# Allegro board prototype_rev4.brd
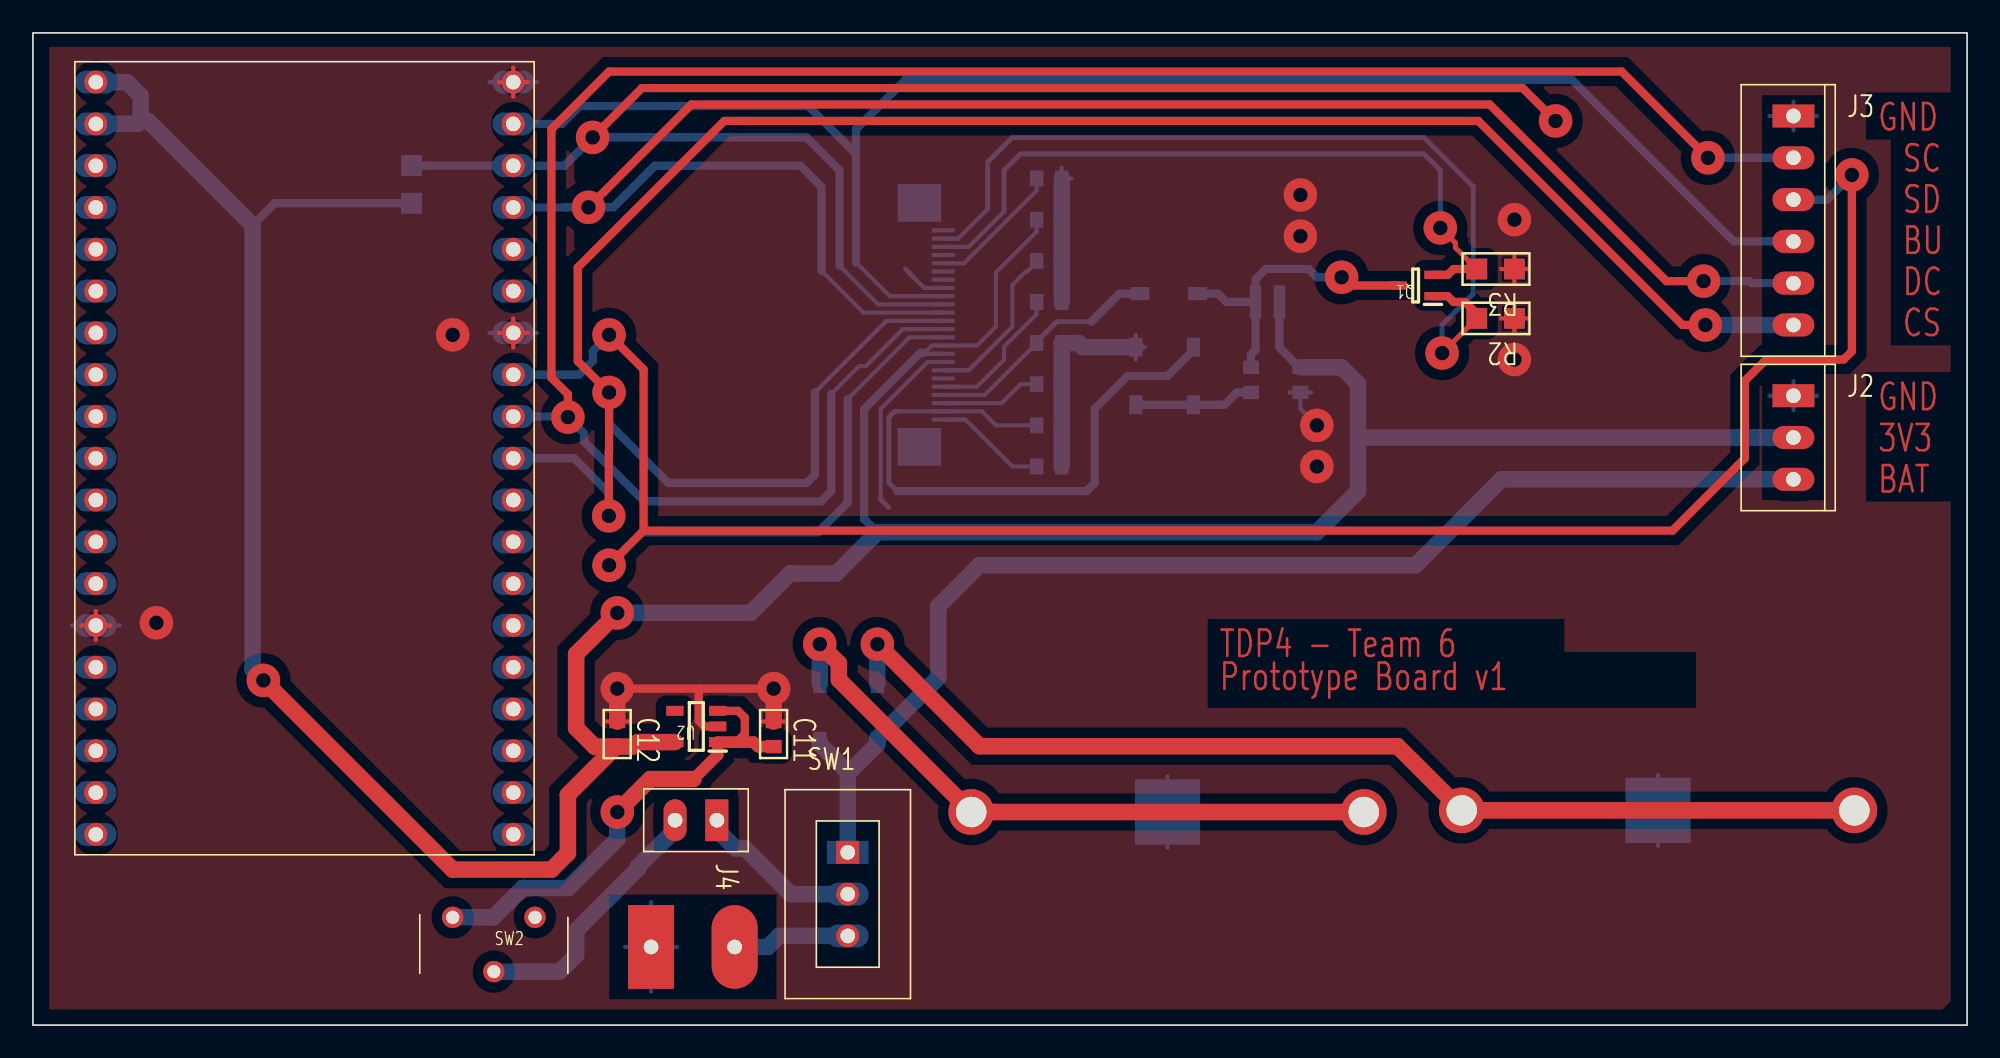
[diagram p0: board, top side]
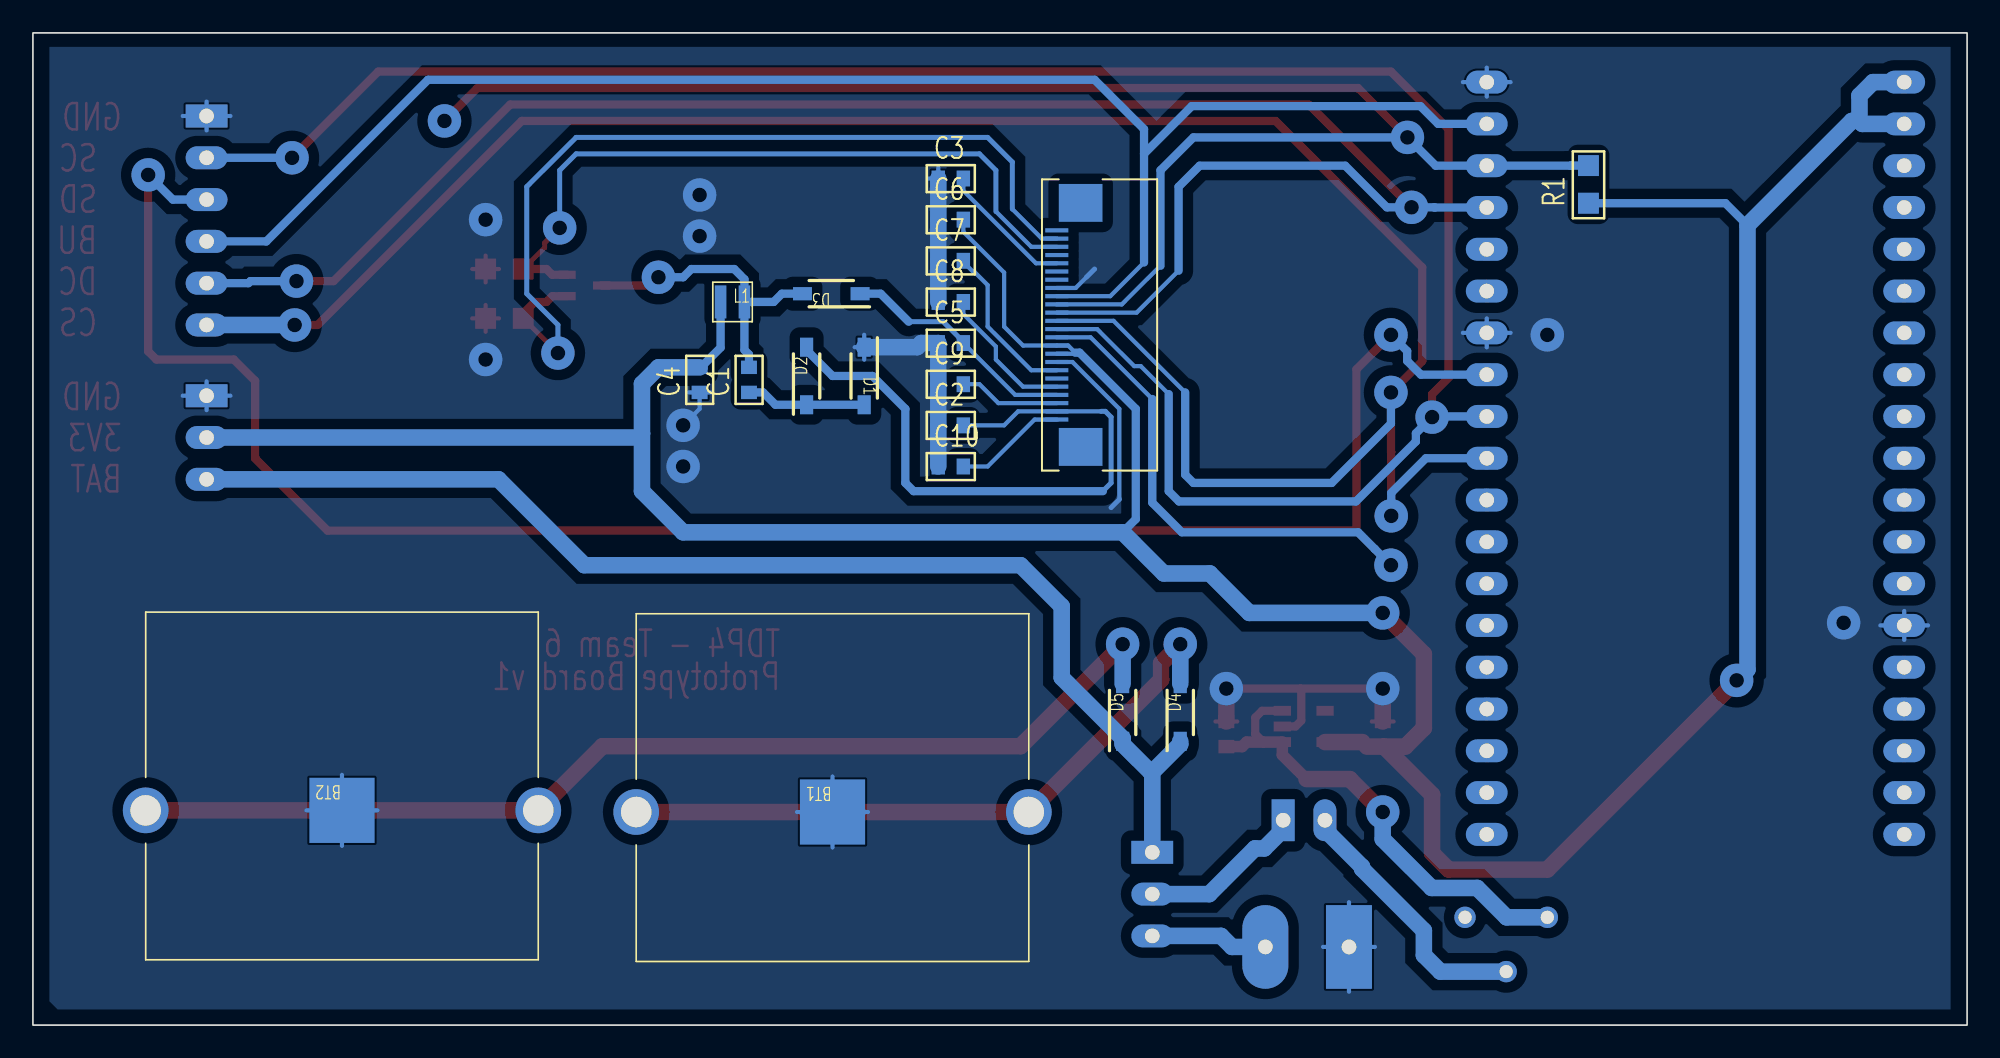
[diagram p1: board, bottom side, seen from below]

Outline 117.5 x 60.3 mm; copper layers: TOP, BOTTOM. Coordinates in mm from the lower left corner of the outline.
Outline path: rectangle 0,0 117.5,60.3

## Design rules (mm)
constraint set DEFAULT: min track width 0.254

## Placement (name value [footprint] x y rotation side)
BT1  Battery_Holder  [30212]  57 12.95 0 bottom
BT2  Battery_Holder  [30212]  86.8 13.05 0 bottom
C1  1u  [GU-C0603]  74 38.45 90 bottom
C2  1u / 50V  [GU-C0603]  62.5 36.45 180 bottom
C3  1u / 25V  [GU-C0603]  62.5 51.45 180 bottom
C4  4.7u  [GU-C0603]  77 38.45 90 bottom
C5  1u / 50V  [GU-C0603]  62.5 41.45 180 bottom
C6  1u / 25V  [GU-C0603]  62.5 48.95 180 bottom
C7  1u / 25V  [GU-C0603]  62.5 46.45 180 bottom
C8  1u / 25V  [GU-C0603]  62.5 43.95 180 bottom
C9  1u / 25V  [GU-C0603]  62.5 38.95 180 bottom
C10  1u / 25V  [GU-C0603]  62.5 33.95 180 bottom
C11  1u  [GU-C0603]  45 18.45 270 top
C12  1u  [GU-C0603]  35.5 18.45 270 top
D1  MBR0530T1  [SOD3716X135N]  67 39.45 270 bottom
D2  MBR0530T1  [SOD3716X135N]  70.5 39.45 90 bottom
D3  MBR0530T1  [SOD3716X135N]  69 44.45 0 bottom
D4  MBR0530T1  [SOD3716X135N]  47.8 19 90 bottom
D5  MBR0530T1  [SOD3716X135N]  51.3 19 90 bottom
J1  SFV24R-4STE1HLF  [AMPHENOL_SFV24R-4STE1HLF]  49.2 33.7 90 bottom
J2  VOLT TP  [GU-MOLEX3]  106.95 38.25 0 top
J3  SPI TP  [GU-MOLEX6]  106.95 55.25 0 top
J4  AMMETER TP  [GU-JUMPER2]  41.55 12.45 270 top
J5  EXT POWER  [GU-TERMINAL2-200]  37.55 4.75 90 top
L1  10uH  [NRH2412T2R2MNGH]  75 43.95 180 bottom
Q1  SI1308EDL-T1-BE3  [SOT65P210X110-3N]  84 44.95 180 top
R1  100k  [GU-R0805]  23 49.95 90 bottom
R2  10k  [GU-R0805]  90 42.95 180 top
R3  3R  [GU-R0805]  90 45.95 180 top
SW1  POWER SELECTOR  [GU-SW-SLIDE-SPDT]  49.5 10.5 0 top
SW2  -  [SSSS213100]  30.5 6.55 0 top
U1  ESP32-DevKitC  [ESP32-DEVKITC]  16.5 34.45 0 top
U2  MIC5317-3.3YM5-TR  [SOT95P280X100-5N]  40.3 18.15 180 top

## Library data of the parts
BT1 BT2 = Battery_Holder_9
C1-C12 = C
D1-D5 = MBR0530T1
J1 = SFV24R-4STE1HLF_0
J2 = CON3
J3 = CON6
J4 = JUMPER
J5 = CON2: User Part Number: TERMINAL2-200
L1 = L
Q1 = SI1308EDL-T1-BE3
R1-R3 = R
SW1 = SW SPDT
SW2 = SSSS213100
U1 = ESP32-DevKitC
U2 = MIC5317-3.3YM5-TR

## Footprints (pads in the part's own frame, mm; a bottom-side part is the same pattern mirrored in y, then rotated)
30212
  round 2.775 hole 1.85: 1(0,0) 2(23.85,0)
  rect 3.96x3.96 smd: NP1(11.925,0)
AMPHENOL_SFV24R-4STE1HLF
  rect 2.3x2.65 smd: (1.44,4.65) (16.27,4.65)
  rect 0.25x1.4 smd: 1(3.1,6.1) 2(3.6,6.1) 3(4.1,6.1) 4(4.6,6.1) 5(5.1,6.1) 6(5.6,6.1) 7(6.1,6.1) 8(6.6,6.1) 9(7.1,6.1) 10(7.6,6.1) 11(8.1,6.1) 12(8.6,6.1) 13(9.1,6.1) 14(9.6,6.1) 15(10.1,6.1) 16(10.6,6.1) 17(11.1,6.1) 18(11.6,6.1) 19(12.1,6.1) 20(12.6,6.1) 21(13.1,6.1) 22(13.6,6.1) 23(14.1,6.1) 24(14.6,6.1)
ESP32-DEVKITC
  round 1.397 hole 0.889: 1(-12.68,22.86) 2(-12.68,20.32) 3(-12.68,17.78) 4(-12.68,15.24) 5(-12.68,12.7) 6(-12.68,10.16) 7(-12.68,7.62) 8(-12.68,5.08) 9(-12.68,2.54) 10(-12.68,0) 11(-12.68,-2.54) 12(-12.68,-5.08) 13(-12.68,-7.62) 14(-12.68,-10.16) 15(-12.68,-12.7) 16(-12.68,-15.24) 17(-12.68,-17.78) 18(-12.68,-20.32) 19(-12.68,-22.86) 20(12.68,-22.86) 21(12.68,-20.32) 22(12.68,-17.78) 23(12.68,-15.24) 24(12.68,-12.7) 25(12.68,-10.16) 26(12.68,-7.62) 27(12.68,-5.08) 28(12.68,-2.54) 29(12.68,0) 30(12.68,2.54) 31(12.68,5.08) 32(12.68,7.62) 33(12.68,10.16) 34(12.68,12.7) 35(12.68,15.24) 36(12.68,17.78) 37(12.68,20.32) 38(12.68,22.86)
GU-C0603
  rect 0.813x0.965 smd: 1(0,0) 2(1.524,0)
GU-JUMPER2
  rect 2.54x1.397 hole 0.889: 1(0,0)
  oval 2.54x1.397 hole 0.889: 2(0,-2.54)
GU-MOLEX3
  rect 2.54x1.397 hole 0.889: 1(0,0)
  oval 2.54x1.397 hole 0.889: 2(0,-2.54) 3(0,-5.08)
GU-MOLEX6
  rect 2.54x1.397 hole 0.889: 1(0,0)
  oval 2.54x1.397 hole 0.889: 2(0,-2.54) 3(0,-5.08) 4(0,-7.62) 5(0,-10.16) 6(0,-12.7)
GU-R0805
  rect 1.27x1.27 smd: 1(0,0) 2(2.286,0)
GU-SW-SLIDE-SPDT
  rect 1.397x1.397 hole 0.889: 1(0,0)
  round 1.397 hole 0.889: 2(0,-2.54) 3(0,-5.08)
GU-TERMINAL2-200
  rect 5.08x2.794 hole 0.889: 1(0,0)
  oval 5.08x2.794 hole 0.889: 2(0,-5.08)
NRH2412T2R2MNGH
  rect 0.7x2 smd: 1(-0.725,0) 2(0.725,0)
SOD3716X135N
  rect 1.15x0.8 smd: 1(-1.75,0) 2(1.75,0)
SOT65P210X110-3N
  rect 1.05x0.5 smd: 1(-1.05,0.65) 2(-1.05,-0.65) 3(1.05,0)
SOT95P280X100-5N
  rect 1.05x0.6 smd: 1(-1.3,0.95) 2(-1.3,0) 3(-1.3,-0.95) 4(1.3,-0.95) 5(1.3,0.95)
SSSS213100
  round 1.3 hole 0.8: 1(0,0) 2(-2.5,-3.3) 3(-5,0)

## Nets
3V3: C4.2 C6.2 C12.2 J1.9 J1.10 J2.2 L1.1 R1.1 U1.1 U1.2 U2.5(VOUT)
GND: BT1.NP1 BT2.NP1 C2.1 C3.1 C4.1 C5.1 C6.1 C7.1 C8.1 C9.1 C10.1 C11.1 C12.1 D1.1(C) J1.8 J1.17 J2.1 J3.1 J5.1 R2.1 R3.1 U1.14 U1.32 U1.38 U2.2
VCC: C11.2 SW2.3(NO) U2.1 U2.3
BATT: D4.1(C) D5.1(C) J2.3 SW1.1
BUSY: J1.16 J3.4 U1.37
DC: J1.14 J3.5 U1.35
E-INK_CS: J1.13 J3.6 U1.29
EXT: J5.2 SW1.3(NO)
GDR: J1.23 Q1.1 R2.2
RESE: J1.22 Q1.2(S) R3.2
RESET: J1.15 R1.2 U1.36
SCL: J1.12 J3.2 U1.30
SDA: J1.11 J3.3 U1.31
VGH: C5.2 D3.1(C) J1.4
VGL: C2.2 D2.2 J1.2
N09940: C1.2 D3.2 L1.2 Q1.3
N26254: C1.1 D1.2 D2.1(C)
N26834: C10.2 J1.1
N27155: C9.2 J1.3
N27189: C8.2 J1.5
N27231: C7.2 J1.7
N27307: C3.2 J1.20
N33521: J4.1 SW1.2
N36276: J4.2 SW2.2
N72588: BT2.1 BT2.2 D5.2
N72605: BT1.1 BT1.2 D4.2

Pads without a net: J1 6 18 19 21 24; SW2 1; U1 3 4 5 6 7 8 9 10 11 12 13 15 16 17 18 19 20 21 22 23 24 25 26 27 28 33 34; U2 4

## Via types
v1: diameter 2.032, hole 0.889, TOP to BOTTOM, 30 vias

## Routing (per net, layer and track width the routed paths; a pad name or vN(x,y) marks a point on that pad's centre or on a via; arc(x,y) is an arc through that point)
3V3: length 217.1
  TOP w0.7: 36.46,16.93 36.73,17.2
  TOP w1: v1(35.5,25.05) 33,22.55 33,18.05 34.12,16.93 35.42,16.93 ; v1(14,20.95) 25.5,9.45 31.5,9.45 32.5,10.45 32.5,14 35.42,16.93 ; 35.42,16.93 C12.2 36.46,16.93 ; 36.73,17.2 U2.5
  BOTTOM w0.254: C6.2 60.98,48.21 58.5,45.74 58.5,42.45 57.35,41.3 J1.10 54.61,41.3 54.18,40.87 54.24,40.8 J1.9
  BOTTOM w0.5: C4.2 76.92,39.97 75.72,41.17 L1.1 ; 13.34,48.61 14.68,49.95 R1.1 ; 54.18,40.87 53.92,40.87 50.5,37.45 50.5,30.75 51.3,29.95
  BOTTOM w1: J2.2 80.74,35.71 80.5,35.95 ; v1(35.5,25.05) 43.6,25.05 46,27.45 48.8,27.45 51.3,29.95 78,29.95 80.5,32.45 80.5,35.95 ; U1.1 5.72,57.31 6.54,56.49 6.54,54.95 ; U1.2 6.36,54.77 6.54,54.95 ; 80.5,35.95 80.5,38.97 79.5,39.97 C4.2 ; 6.54,54.95 7,54.95 13.34,48.61 13.34,21.61 v1(14,20.95)
GND: length 126.2
  TOP w0.254: 29.18,56.43 U1.38 ; U1.38 28.3,57.31 ; U1.38 30.06,57.31 ; U1.38 29.18,58.19 ; 29.18,41.19 U1.32 ; U1.32 30.06,42.07 ; U1.32 29.18,42.95 ; U1.32 28.3,42.07 ; U1.14 4.7,24.29 ; U1.14 3.82,23.41 ; U1.14 3.82,25.17 ; U1.14 2.94,24.29 ; R3.1 90,46.76 ; R3.1 90.81,45.95 ; R3.1 90,45.14 ; R3.1 89.19,45.95 ; 34.84,18.45 C12.1 36.16,18.45 ; R2.1 90.81,42.95 ; R2.1 90,42.14 ; R2.1 89.19,42.95 ; R2.1 90,43.76 ; 45.66,18.45 C11.1 44.34,18.45
  TOP w0.5: v1(45,20.45) 40.5,20.45 ; 40.5,20.45 40.45,20.4 40.45,18.5 40.8,18.15 U2.2 ; 40.5,20.45 v1(35.5,20.45)
  TOP w1: C12.1 v1(35.5,20.45) ; C11.1 v1(45,20.45)
  BOTTOM w0.254: 62.5,52.11 C3.1 63.08,51.45 ; U1.32 30.63,42.07 ; U1.32 27.73,42.07 ; U1.32 29.18,42.95 ; U1.32 29.18,41.19 ; 53.5,45.45 54.15,44.8 J1.17 ; 76.34,38.45 C4.1 ; C4.1 77,37.45 v1(78,36.45) ; C4.1 77.66,38.45 ; 67,40.45 D1.1 ; D1.1 67.58,41.2 ; D1.1 67,41.95 ; J1.8 54.35,40.3 51.5,37.45 51.5,31.95 ; J3.1 106.95,56.13 ; J3.1 106.95,54.37 ; J3.1 108.4,55.25 ; J3.1 105.5,55.25 ; J2.1 106.95,39.13 ; J2.1 108.4,38.25 ; J2.1 105.5,38.25 ; J2.1 106.95,37.37 ; 35.98,4.75 J5.1 ; J5.1 39.12,4.75 ; J5.1 37.55,2.03 ; J5.1 37.55,7.47 ; BT2.NP1 100.88,13.05 ; BT2.NP1 96.57,13.05 ; BT2.NP1 98.72,10.89 ; BT2.NP1 98.72,15.21 ; BT1.NP1 71.08,12.95 ; BT1.NP1 66.77,12.95 ; BT1.NP1 68.92,10.79 ; BT1.NP1 68.92,15.11 ; 29.18,56.43 U1.38 ; U1.38 30.63,57.31 ; U1.38 29.18,58.19 ; U1.38 27.73,57.31 ; 2.37,24.29 U1.14 ; U1.14 3.82,25.17 ; U1.14 3.82,23.41 ; U1.14 5.27,24.29
  BOTTOM w0.3: 52,31.45 51.5,31.95 ; 53,45.95 53.5,45.45
  BOTTOM w1: C10.1 C2.1 C9.1 C5.1 63.53,41.45 63.78,41.2 D1.1 ; C8.1 C7.1 C6.1 C3.1
  vias: v1(7.5,24.45) v1(25.5,41.95) v1(77,50.45) v1(77,47.95) v1(78,33.95) v1(90,48.95) v1(90,40.45)
VCC: length 28.9
  TOP w0.5: 42.75,17.2 43.24,17.7 43.24,18.69 42.83,19.1 U2.3
  TOP w0.7: C11.2 44.04,16.93 43.77,17.2 U2.1 41.6,16.42 40.13,14.95
  TOP w1: 40.13,14.95 37.5,14.95 v1(35.5,12.95)
  BOTTOM w1: SW2.3 27.98,6.55 29.76,8.34 32.53,8.34 35.5,11.31 v1(35.5,12.95)
BATT: length 75
  BOTTOM w1: J2.3 89.22,33.17 84,27.95 57.5,27.95 55,25.45 55,21.12 51.3,17.42 D5.1 51.3,17.07 49.6,15.37 49.5,15.37 ; D4.1 47.8,17.07 49.5,15.37 ; SW1.1 49.5,15.37
BUSY: length 99
  BOTTOM w0.254: 50,46.35 52.05,44.3 J1.16
  BOTTOM w0.5: U1.37 32.13,54.77 33.21,55.85 47.1,55.85 50,52.95 ; 50,52.95 50,54.45 53,57.45 93.5,57.45 103.32,47.63 J3.4 ; 50,52.95 50,46.35
DC: length 114.1
  TOP w0.5: v1(101.49,45.21) 99.24,45.21 88.5,55.95 40,55.95 v1(33.75,49.7)
  BOTTOM w0.254: 47.9,45.85 50.45,43.3 J1.14
  BOTTOM w0.5: v1(101.49,45.21) 104.29,45.21 104.41,45.09 J3.5 ; 47.9,45.85 47.9,50.95 46.62,52.23 37.78,52.23 35.25,49.7 v1(33.75,49.7) 32.36,49.7 32.35,49.69 U1.35
E-INK_CS: length 137.3
  TOP w0.5: v1(34.98,30.95) 34.98,34.83 35,34.85 v1(35,38.45) 33.1,40.35 33.1,46.05 42,54.95 87.81,54.95 100.21,42.55 v1(101.6,42.55)
  BOTTOM w0.254: J1.13 51.85,42.8 47.5,38.45
  BOTTOM w0.5: v1(35,38.45) 35,36.55 38.6,32.95 47,32.95 47.5,33.45 47.5,38.45 ; v1(34.98,30.95) 34.98,32.34 32.88,34.45 U1.29
  BOTTOM w1: J3.6 v1(101.6,42.55)
EXT: length 7.1
  BOTTOM w1: J5.2 44.65,4.75 45.32,5.42 SW1.3
GDR: length 54.9
  TOP w0.3: v1(85.61,40.84) R2.2
  TOP w0.5: Q1.1 85.95,44.3 86.3,43.95 87,43.95 87.71,43.24 R2.2
  BOTTOM w0.254: J1.23 56.21,47.8 58,49.59
  BOTTOM w0.3: 58,49.59 58,52.45 59.5,53.95 84.5,53.95 87.5,50.95 87.5,44.45 85.61,42.56 v1(85.61,40.84)
RESE: length 44.1
  TOP w0.3: v1(85.5,48.45) 86.41,47.54 86.41,47.25 R3.2
  TOP w0.5: Q1.2 85.95,45.6 86.3,45.95 R3.2
  BOTTOM w0.254: 59,49.45 56.85,47.3 J1.22
  BOTTOM w0.3: 59,49.45 59,51.95 60,52.95 84.5,52.95 85.5,51.95 v1(85.5,48.45)
RESET: length 101.2
  TOP w0.5: v1(34,53.95) 37,56.95 90.5,56.95 v1(92.5,54.95)
  BOTTOM w0.254: 49,46.15 51.35,43.8 J1.15
  BOTTOM w0.5: R1.2 24.09,52.24 24.1,52.23 U1.36 32.28,52.23 v1(34,53.95) 47,53.95 49,51.95 49,46.15
SCL: length 133.3
  TOP w0.5: v1(32.5,36.95) 32.5,38.34 31.5,39.34 31.5,54.45 35,57.95 96.52,57.95 v1(101.76,52.71)
  BOTTOM w0.254: J1.12 52.85,42.3 50.6,40.05 50.2,40.05 48.5,38.35
  BOTTOM w0.5: U1.30 32.46,36.99 v1(32.5,36.95) 33.48,35.97 33.48,35.47 37.12,31.83 47.88,31.83 48.5,32.45 48.5,38.35 ; J3.2 v1(101.76,52.71)
SDA: length 148.2
  TOP w0.5: 37.1,30.05 99.6,30.05 104,34.45 104,39.16 105.3,40.45 110,40.45 110.5,40.95 v1(110.5,51.67) ; 37.1,30.05 37.1,39.85 v1(35,41.95) ; 37.1,30.05 v1(35,27.95)
  BOTTOM w0.254: 49.5,38.05 53.25,41.8 J1.11
  BOTTOM w0.5: v1(35,27.95) 35.98,28.94 35.98,28.94 36.99,29.95 47.7,29.95 49.5,31.75 49.5,38.05 ; J3.3 109,50.17 v1(110.5,51.67) ; v1(35,41.95) 34.02,40.97 34.02,40.37 33.18,39.53 U1.31
VGH: length 14.5
  BOTTOM w0.254: J1.4 57.83,38.3 C5.2
  BOTTOM w0.3: C5.2 60.98,41.53 62.2,42.75 64.3,42.75
  BOTTOM w0.5: 64.3,42.75 66,44.45 D3.1
VGL: length 38.6
  BOTTOM w0.254: 52.6,37.3 J1.2 57.65,37.3 58.5,36.45 C2.2
  BOTTOM w0.3: 52.6,37.3 52.35,37.3 52,36.95 52,32.95 52.5,32.45 ; C2.2 60.98,36.53
  BOTTOM w0.5: 52.5,32.45 64,32.45 64.5,32.95 64.5,37.45 66.5,39.45 68.92,39.45 70.5,41.03 D2.2
N09940: length 18.5
  TOP w0.5: v1(79.5,45.45) 80,44.95 Q1.3
  BOTTOM w0.5: L1.2 72.5,43.95 72,44.45 D3.2 ; L1.2 74.28,41.03 74,40.76 C1.2 ; L1.2 74.28,45.33 74.9,45.95 77.5,45.95 78,45.45 v1(79.5,45.45)
N26254: length 7.3
  BOTTOM w0.5: D1.2 D2.1 72.39,37.7 73.14,38.45 C1.1
N26834: length 6.9
  BOTTOM w0.254: J1.1 56.65,36.8 59.5,33.95 C10.2
N27155: length 6.2
  BOTTOM w0.254: C9.2 60,38.95 58.85,37.8 J1.3
N27189: length 8.7
  BOTTOM w0.254: J1.5 57.35,38.8 59,40.45 59,41.24 60.98,43.21 C8.2
N27231: length 10
  BOTTOM w0.254: C7.2 60.98,46.37 60.39,45.79 60.31,45.79 59.5,44.97 59.5,42.45 56.85,39.8 J1.7
N27307: length 8.2
  BOTTOM w0.254: J1.20 56.56,46.3 60.98,50.71 C3.2
N33521: length 10.1
  BOTTOM w1: J4.1 41.55,11.88 42.69,10.74 43.26,10.74 46.04,7.96 SW1.2
N36276: length 16.1
  BOTTOM w1: J4.2 39.01,11.88 36.75,9.62 36.75,9.5 33,5.74 33,4.25 32,3.25 SW2.2
N72588: length 65.9
  TOP w1: v1(51.3,23.15) 57.5,16.95 82.9,16.95 BT2.1 BT2.2
  BOTTOM w1: D5.2 v1(51.3,23.15)
N72605: length 40.3
  TOP w1: v1(47.8,23.15) 48.96,21.99 48.96,20.99 BT1.1 BT1.2
  BOTTOM w1: D4.2 v1(47.8,23.15)

## Copper pours and planes (outline as drawn; the poured copper is in the pictures)
GND on TOP: 1,59.45 116.5,59.45 116.5,1.45 116,0.95 1,0.95 ; 7 cut-outs
GND on BOTTOM: 1,59.45 116.5,59.45 116.5,1.45 116,0.95 1,0.95 ; 14 cut-outs

## Text on the board
TOP: TDP4 - Team 6 | Prototype Board v1 | GND | 3V3 | BAT | SC | SD | BU | DC | CS
